# Altium PCB IHM.PcbDoc
Units mm, origin at the board's own origin, x right, y up, seen from the top; angles counter-clockwise.
Board outline 100 x 50 mm, 4 copper layers (Top Layer, Int1 (GND), Int2 (GND), Bottom Layer), stack 1.57 mm thick; 91 components, 84 nets, 309 pads, 71 vias.
Unrouted connection lines stored in the file: 16.
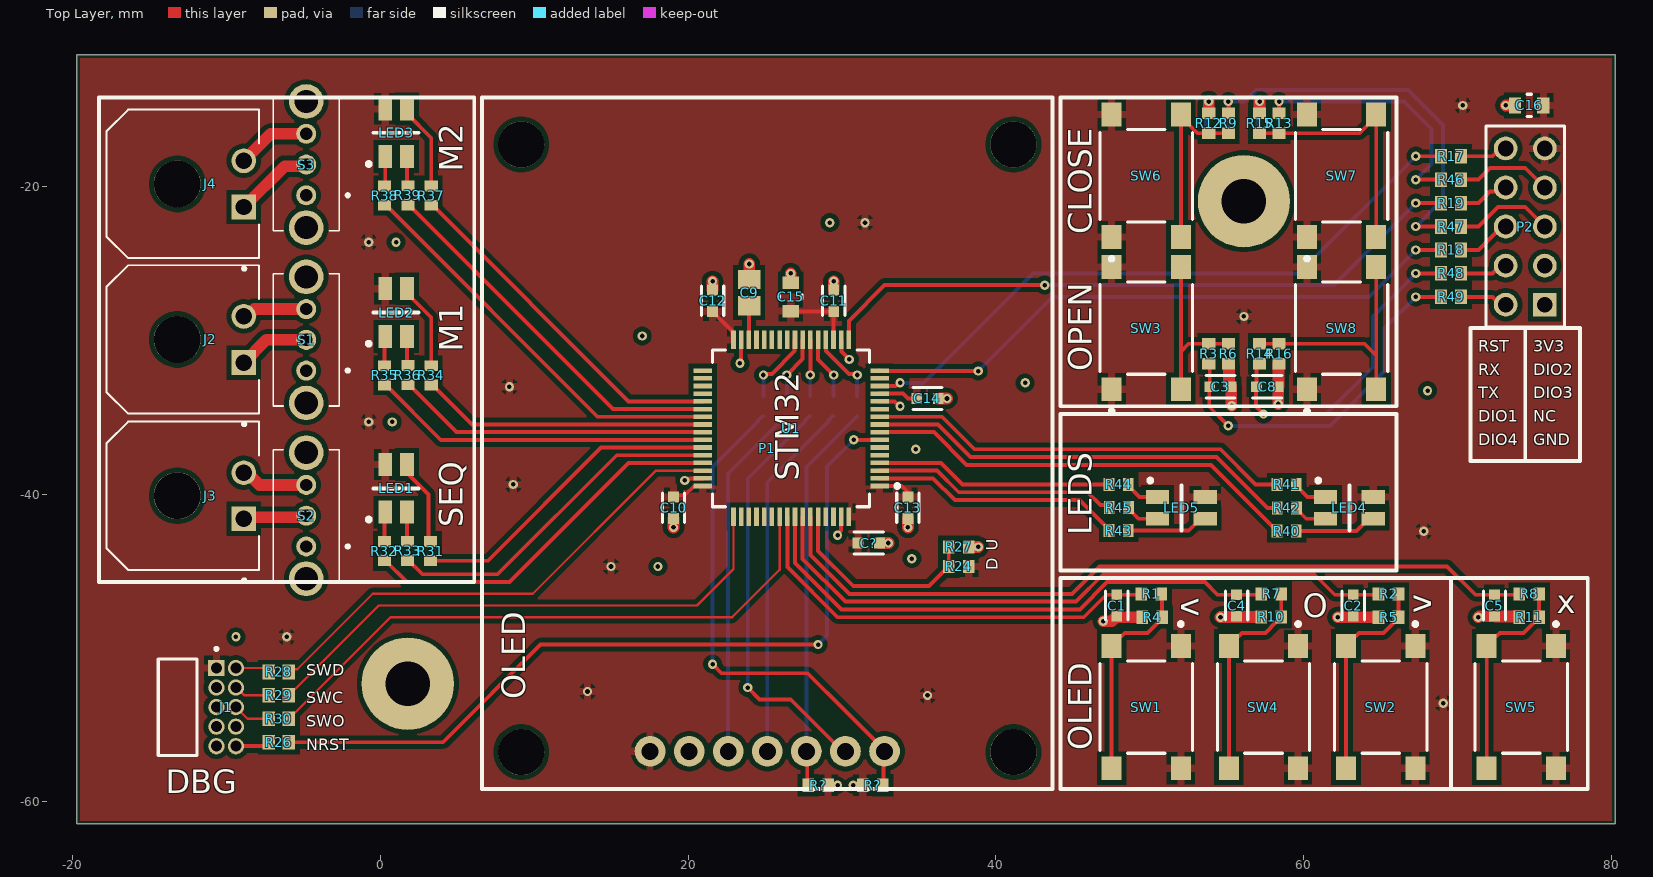
[diagram p0: Top Layer view]
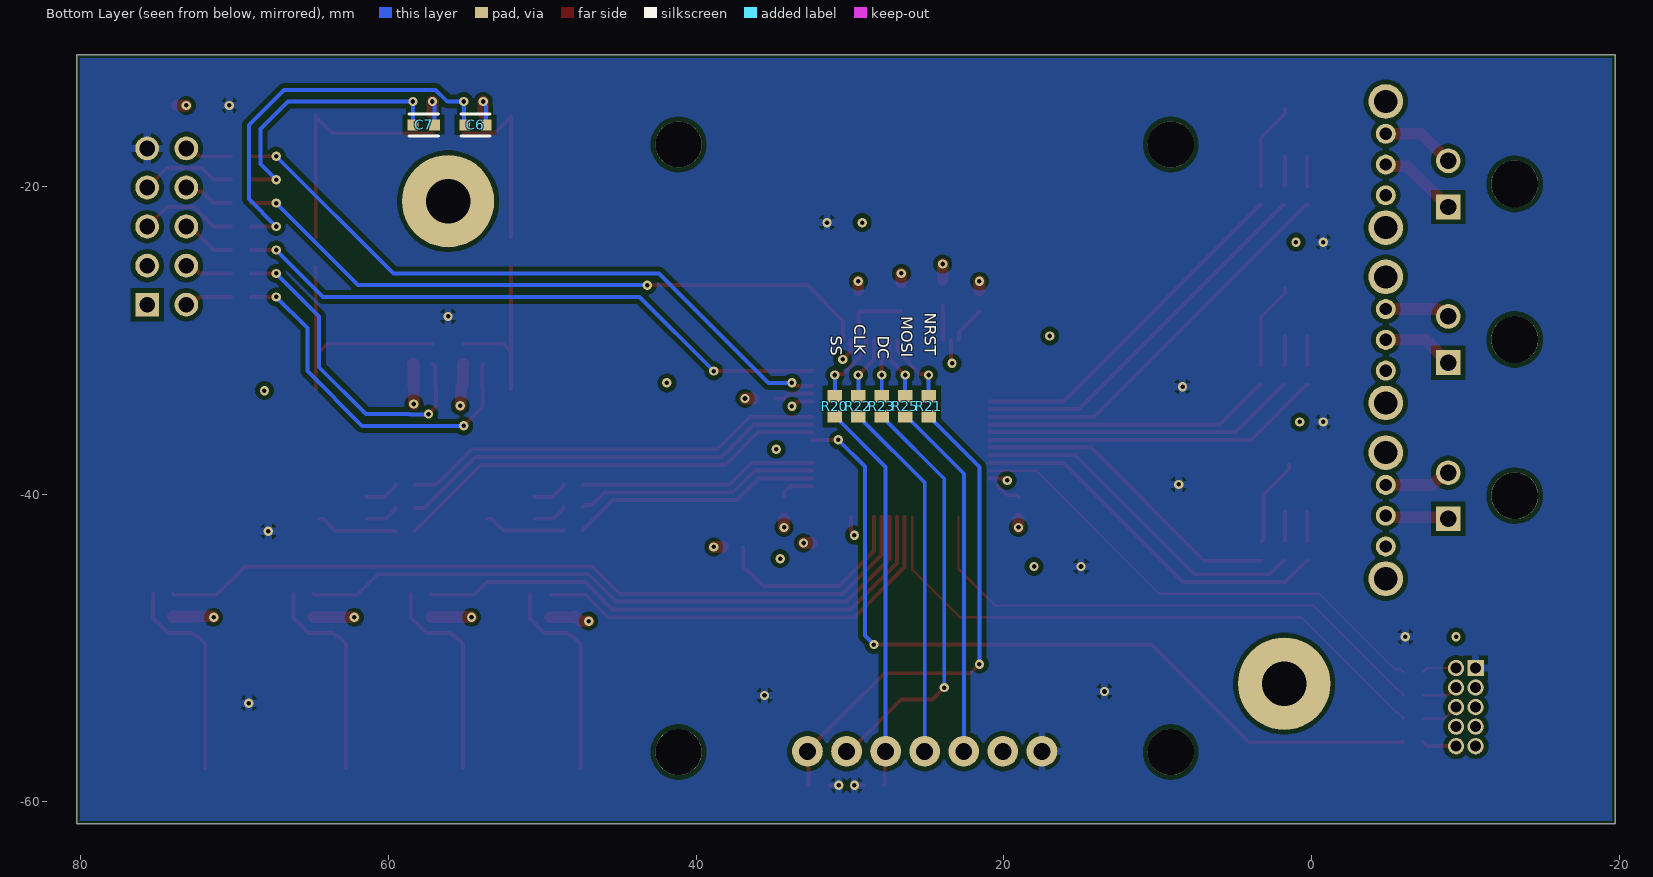
[diagram p1: Bottom Layer view, seen from below]
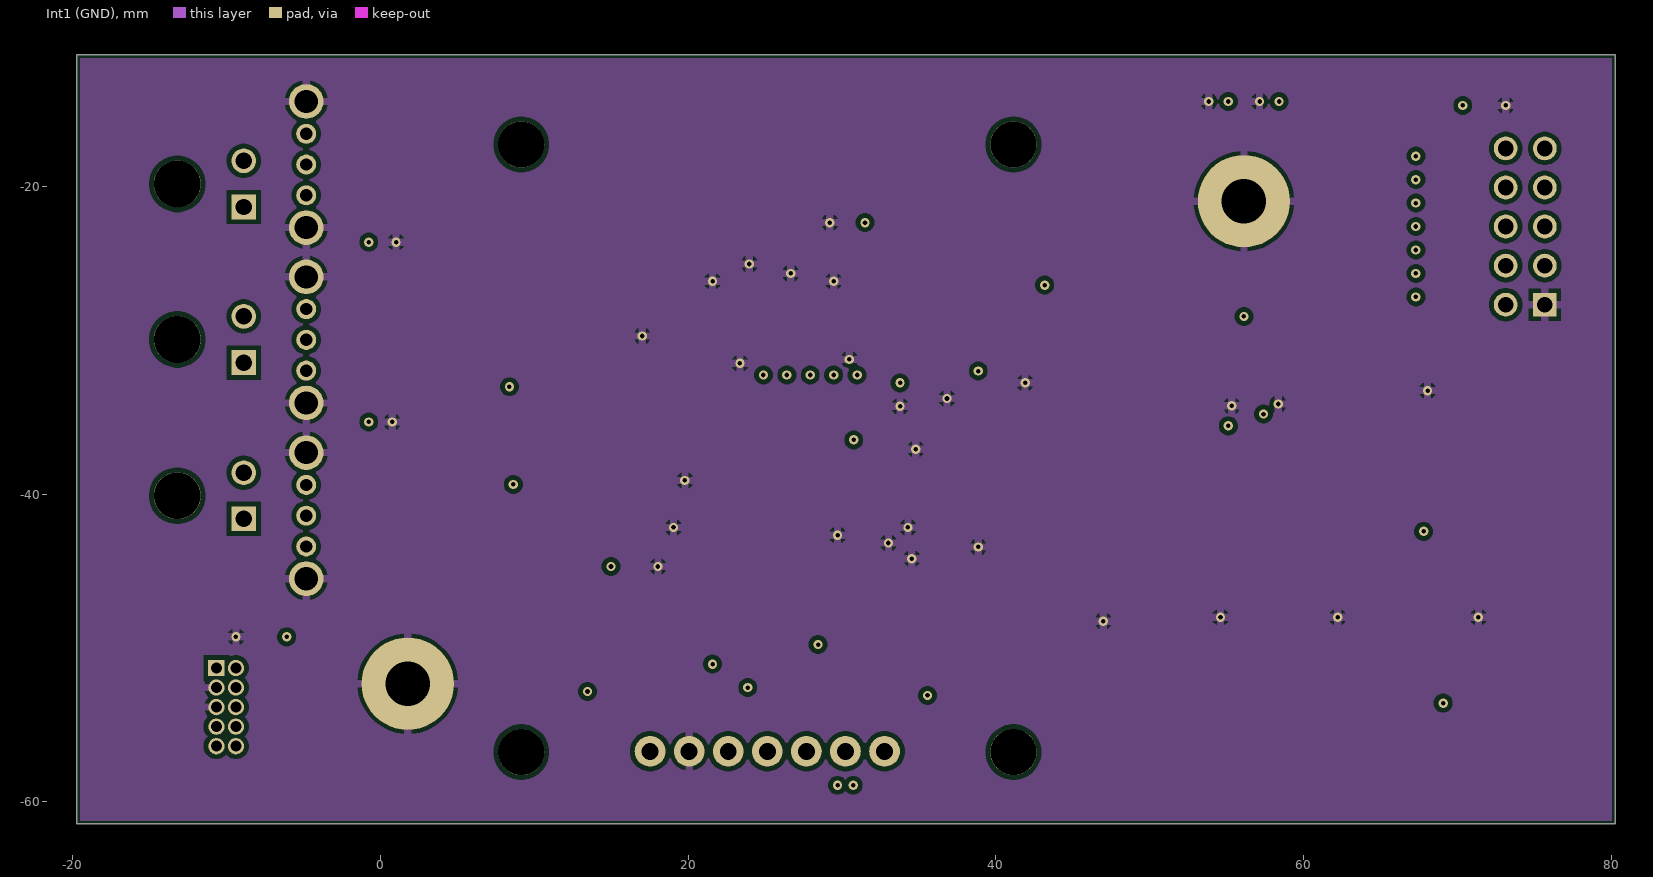
[diagram p2: Int1 (GND)]
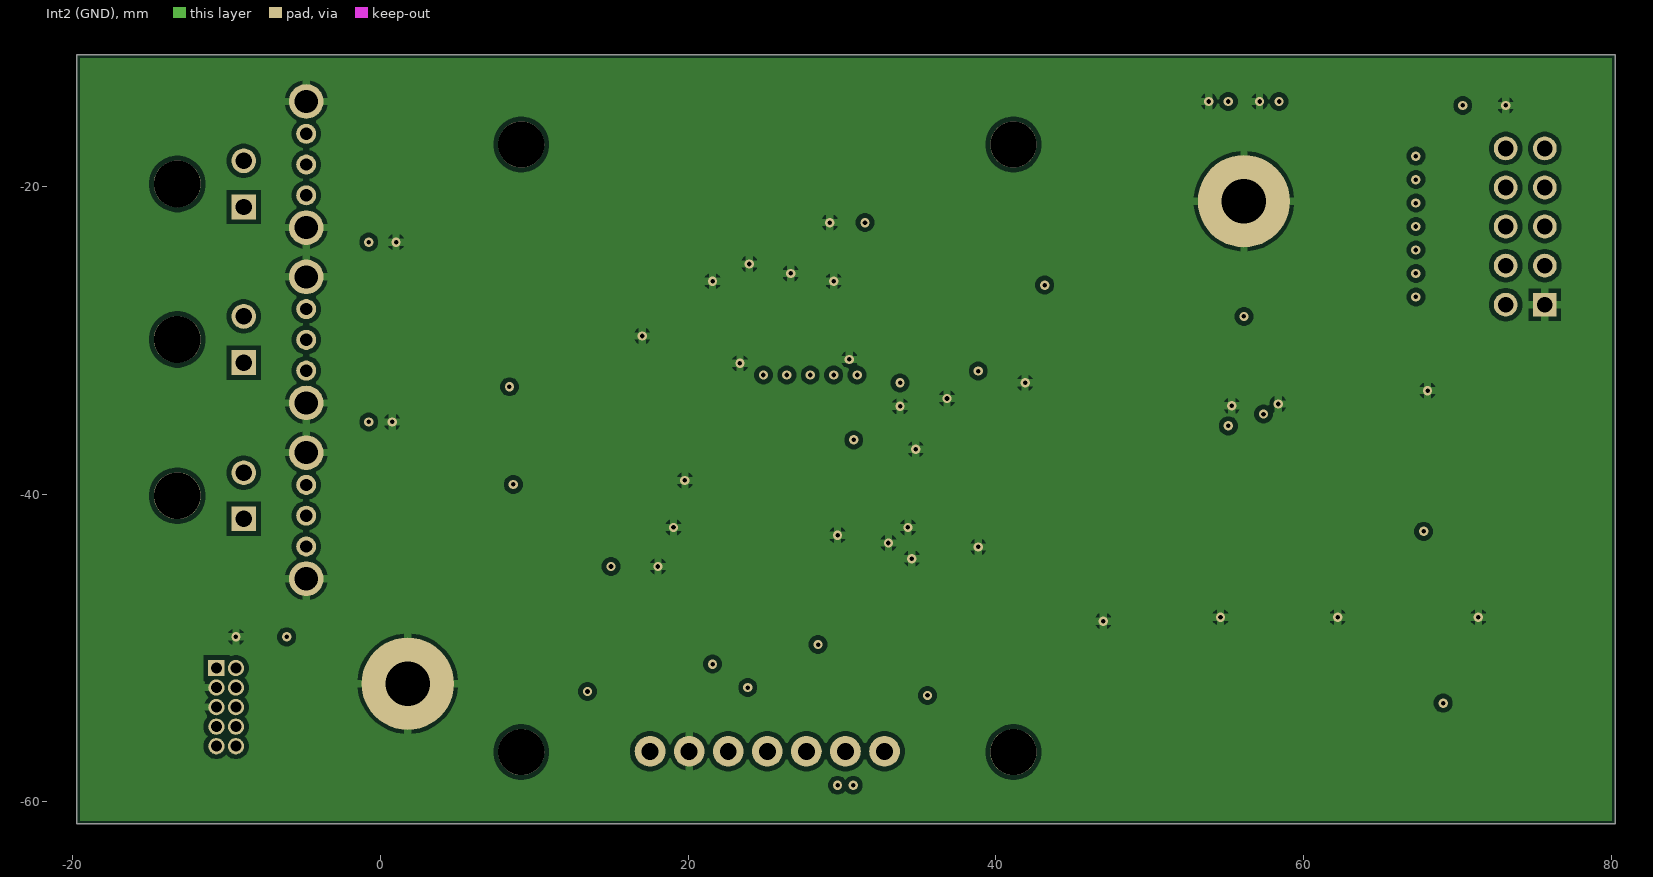
[diagram p3: Int2 (GND)]
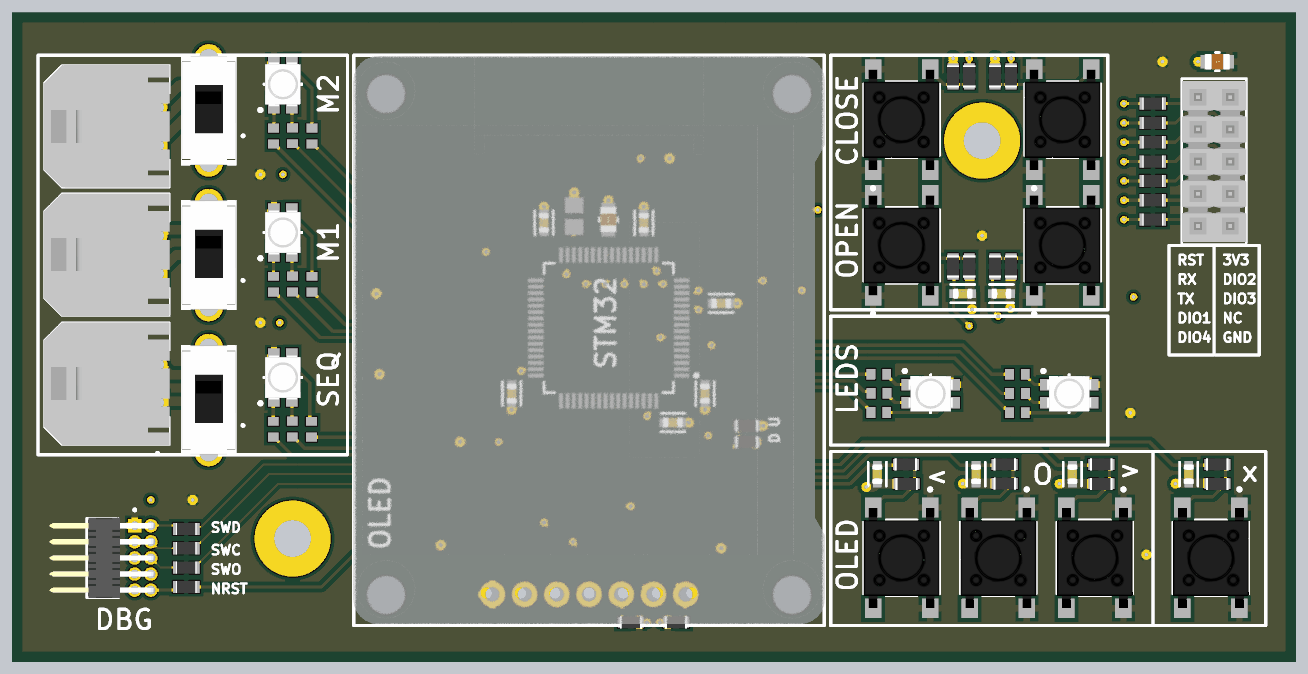
[diagram p4: 3D render of the assembled board from above, using the file's embedded part models]
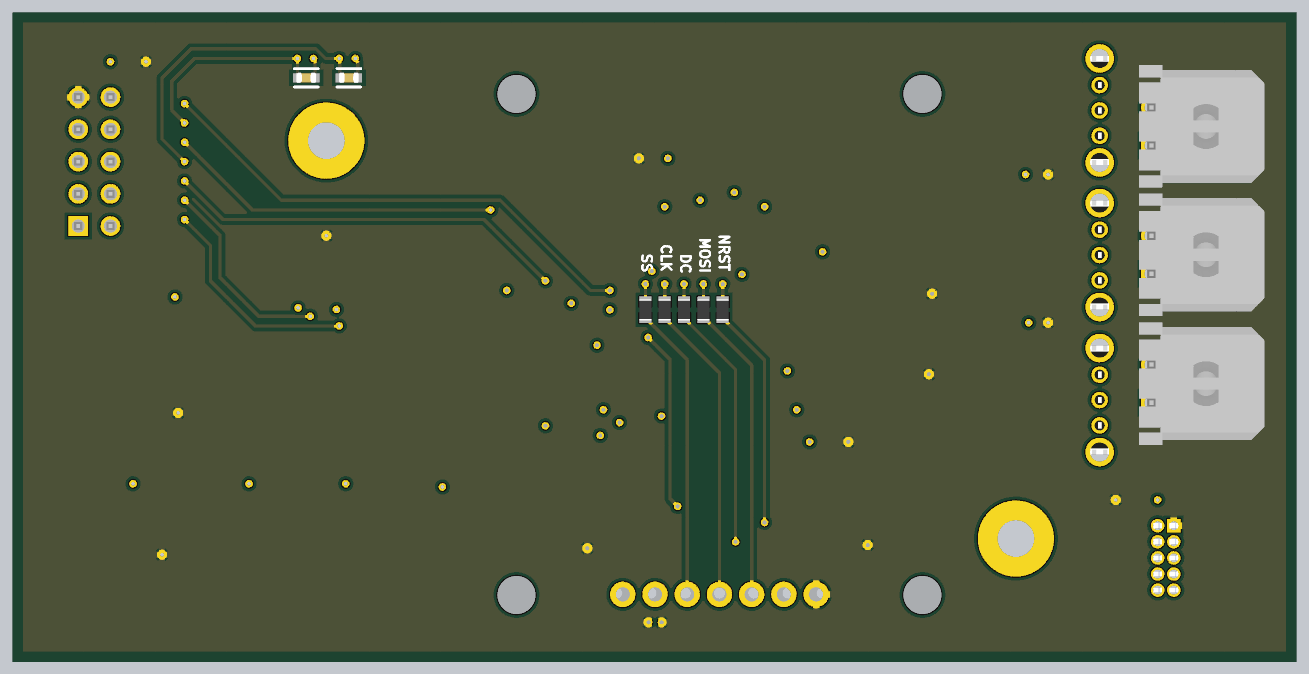
[diagram p5: 3D render of the assembled board from below, using the file's embedded part models]

## Layer stack, top to bottom
Top Solder: solder mask 0.0254, SM-001, Dk 4
Top Layer: signal copper 0.035
Dielectric 2: prepreg 0.1, PP-017, Dk 4.3
Int1 (GND): signal copper 0.0175
Dielectric 3: core 1.265, Core-039, Dk 4.8
Int2 (GND): signal copper 0.0175
Dielectric 4: prepreg 0.1, PP-017, Dk 4.3
Bottom Layer: signal copper 0.035
Bottom Solder: solder mask 0.0254, SM-001, Dk 4

## Board outline
-19.736,-61.446 -19.736,-11.446 80.264,-11.446 80.264,-61.446

## Design rules (kind name [scope] priority, off if disabled: settings)
BoardOutlineClearance [All] p1: gap=0.2 ignorepadtopadclearanceinfootprint=FALSE
Clearance HF_clearance [InNetClass('HF')] p1: gap=0.3 ignorepadtopadclearanceinfootprint=TRUE except(0.127: SMDPad-SMDPad; 0.2: Arc-SMDPad Arc-THPad Track-SMDPad Track-THPad; 0.254: Arc-Via Track-Via; 0.33: Arc-Hole Track-Hole; 0.5: THPad-THPad)
Clearance [All] p2: gap=0.3 ignorepadtopadclearanceinfootprint=TRUE except(0.127: Arc-Arc Arc-Track Track-Track SMDPad-SMDPad; 0.2: Arc-SMDPad Arc-THPad Track-SMDPad Track-THPad; 0.254: Arc-Via Track-Via; 0.33: Arc-Hole Track-Hole; 0.5: THPad-THPad)
DiffPairsRouting [InDifferentialPairClass('All Differential Pairs')] p1: maxlimit=0.127 minlimit=0.127 mostfreqgap=0.127 toplayer_minwidth=0.093 toplayer_maxwidth=0.093 toplayer_prefwidth=0.093 midlayer1_minwidth=0.088 midlayer1_maxwidth=0.088 midlayer1_prefwidth=0.088 midlayer2_minwidth=0.088 midlayer2_maxwidth=0.088 midlayer2_prefwidth=0.088 bottomlayer_minwidth=0.093 bottomlayer_maxwidth=0.093 bottomlayer_prefwidth=0.093 impedanceprofiledriven=TRUE maxuncoupledlength=12.7
HoleSize [All] p1: absolutevalues=TRUE maxlimit=6.3 minlimit=0.2 maxpercent=80.000 minpercent=20.000
HoleToHoleClearance [All] p1: gap=0.5 allowstackedmicrovias=TRUE
MatchedLengths MatchLengths_xSignals_U4_U5 [InxSignalClass('xSignals_U4_U5_MatchLengthsClass')] p1: tolerance=2.54 checknetsindiffpair=FALSE checkdiffpairvsdiffpair=TRUE checkxsignals=TRUE checkothers=TRUE
MatchedLengths MatchLengths_xSignals_U11_U4_2 [InxSignalClass('xSignals_U11_U4_MatchLengthsClass_2')] p2: tolerance=2.54 checknetsindiffpair=FALSE checkdiffpairvsdiffpair=TRUE checkxsignals=TRUE checkothers=TRUE
MatchedLengths MatchLengths_xSignals_U11_U4_1 [InxSignalClass('xSignals_U11_U4_MatchLengthsClass_1')] p3: tolerance=2.54 checknetsindiffpair=FALSE checkdiffpairvsdiffpair=TRUE checkxsignals=TRUE checkothers=TRUE
MatchedLengths MatchLengths_xSignals_U11_U4 [InxSignalClass('xSignals_U11_U4_MatchLengthsClass')] p4: tolerance=2 checknetsindiffpair=FALSE checkdiffpairvsdiffpair=TRUE checkxsignals=TRUE checkothers=TRUE
MatchedLengths MatchLengths_xSignals_J79_U4 [InxSignalClass('xSignals_J79_U4_MatchLengthsClass')] p5: tolerance=2 checknetsindiffpair=FALSE checkdiffpairvsdiffpair=TRUE checkxsignals=TRUE checkothers=TRUE
MatchedLengths MatchLengths_xSignals_U2_U4 [InxSignalClass('xSignals_U2_U4_MatchLengthsClass')] p6: tolerance=2 checknetsindiffpair=FALSE checkdiffpairvsdiffpair=TRUE checkxsignals=TRUE checkothers=TRUE
MatchedLengths MatchLengths_xSignals_SD1_U4 [InxSignalClass('xSignals_SD1_U4_MatchLengthsClass')] p7: tolerance=2 checknetsindiffpair=FALSE checkdiffpairvsdiffpair=TRUE checkxsignals=TRUE checkothers=TRUE
MatchedLengths MatchLengths_xSignals_SD_1 [InxSignalClass('xSignals_U3_U4_MatchLengthsClass')] p8: tolerance=2.54 checknetsindiffpair=FALSE checkdiffpairvsdiffpair=TRUE checkxsignals=TRUE checkothers=TRUE usedelayunits=TRUE delaytolerance=50.000000
MatchedLengths MatchLengths_U3_Passives_U4 [InxSignalClass('xSignals_U3_Passives_U4_MatchLengthsClass')] p9: tolerance=1.27 checknetsindiffpair=FALSE checkdiffpairvsdiffpair=TRUE checkxsignals=TRUE checkothers=TRUE
MatchedLengths MatchLengths_xSignals_U3_Passives [InxSignalClass('xSignals_U3_Passives_MatchLengthsClass')] p10: tolerance=1.27 checknetsindiffpair=FALSE checkdiffpairvsdiffpair=TRUE checkxsignals=TRUE checkothers=TRUE
MatchedLengths MatchLengths_xSignals_SD [InxSignalClass('xSignals_SD_MatchLengthsClass')] p11: tolerance=2.54 checknetsindiffpair=FALSE checkdiffpairvsdiffpair=TRUE checkxsignals=TRUE checkothers=TRUE
PolygonConnect [All] p1: connectstyle=Relief reliefconductorwidth=0.5 reliefentries=4 polygonreliefangle="90 Angle" airgapwidth=0.254
RoutingVias [All] p1: holewidth=0.3 width=0.6 viastyle="Through Hole" minholewidth=0.2 minwidth=0.4 maxholewidth=0.3 maxwidth=0.6
SolderMaskExpansion [All] p1: expansion=0.102 istentingtop=FALSE
UnRoutedNet [All] p1: checkbadconnections=TRUE
Width HF [InNetClass('HF')] p1: maxlimit=0.151 minlimit=0.151 preferedwidth=0.151 impedanceprofiledriven=TRUE impedanceprofileid={9BCC8DCB-DF7F-471B-8D5B-F17CECE35E11} impedanceprofilevalue=50.000000 minimp=50.000000 maximp=50.000000 favimp=50.000000
Width PWR [InNetClass('PWR')] p2: maxlimit=0.762 minlimit=0.254 preferedwidth=0.762 minimp=50.000000 maximp=50.000000 favimp=50.000000
Width [All] p3: maxlimit=0.254 minlimit=0.254 preferedwidth=0.254
26 further rules are at their usual default settings.

## Classes and differential pairs
net class PWR: GND NetJ2_1 NetJ2_2 NetJ3_1 NetJ3_2 NetJ4_1 NetJ4_2 VCC
net class HF: NetR28_2 NetR29_2 NetR30_2 SWCLK SWDIO SWO
component class SUPPLY: J2 J3 J4 S1 S2 S3
component class STM32: C9 C10 C11 C12 C13 C14 C15 C? J1 R17 R18 R19 R20 R21 R22 R23 R24 R25 R26 R27 R28 R29 R30 R? U1
component class OLED: P1
component class LED: LED1 LED2 LED3 LED4 LED5 R31 R32 R33 R34 R35 R36 R37 R38 R39 R40 R41 R42 R43 R44 R45
component class "CONN SEQ": C16 P2 R46 R47 R48 R49
component class BTN: C1 C2 C3 C4 C5 C6 C7 C8 O R1 R2 R3 R4 R5 R6 R7 R8 R9 R10 R11 R12 R13 R14 R15 R16 SW1 SW2 SW3 SW4 SW5 SW6 SW7 SW8 V

## Components (designator, comment, footprint, x,y, rotation, side; value= is the part's Value field where it differs from the comment)
C1 "CGA3E2X7R1E104K080AA" FP-CGA3E-0_3-0_1-MFG 47.864,-47.244 r270 top
C2 "CGA3E2X7R1E104K080AA" FP-CGA3E-0_3-0_1-MFG 63.246,-47.244 r270 top
C3 "CGA3E2X7R1E104K080AA" FP-CGA3E-0_3-0_1-MFG 54.61,-33.02 r0 top
C4 "CGA3E2X7R1E104K080AA" FP-CGA3E-0_3-0_1-MFG 55.658,-47.244 r270 top
C5 "CGA3E2X7R1E104K080AA" FP-CGA3E-0_3-0_1-MFG 72.422,-47.244 r270 top
C6 "CGA3E2X7R1E104K080AA" FP-CGA3E-0_3-0_1-MFG 54.356,-16.002 r180 bottom
C7 "CGA3E2X7R1E104K080AA" FP-CGA3E-0_3-0_1-MFG 57.72,-16.002 r180 bottom
C8 "CGA3E2X7R1E104K080AA" FP-CGA3E-0_3-0_1-MFG 57.658,-33.02 r0 top
C9 "GRM21BR71E225KA73L" CAPC2013X140X45NL15T25 23.972,-26.902 r270 top
C10 "CGA3E2X7R1E104K080AA" FP-CGA3E-0_3-0_1-MFG 19.05,-40.894 r270 top
C11 "CGA3E2X7R1E104K080AA" FP-CGA3E-0_3-0_1-MFG 29.464,-27.432 r90 top
C12 "CGA3E2X7R1E104K080AA" FP-CGA3E-0_3-0_1-MFG 21.59,-27.432 r90 top
C13 "CGA3E2X7R1E104K080AA" FP-CGA3E-0_3-0_1-MFG 34.29,-40.894 r270 top
C14 "CGA3E2X7R1E104K080AA" FP-CGA3E-0_3-0_1-MFG 35.56,-33.782 r0 top
C15 "C2012X6S1C106K125AC" FP-C2012-125-0_2-MFG 26.67,-27.178 r90 top
C16 "C2012X6S1C106K125AC" FP-C2012-125-0_2-MFG 74.676,-14.732 r180 top
C? "CGA3E2X7R1E104K080AA" FP-CGA3E-0_3-0_1-MFG 31.75,-43.18 r0 top
J1 "FTSH-105-01-F-D-RA" SAMTEC_FTSH-105-01-F-D-RA -10.668,-51.308 r90 top
J2 "436500200" MOLEX_436500200 -12.86,-29.948 r270 top
J3 "436500200" MOLEX_436500200 -12.86,-40.108 r270 top
J4 "436500200" MOLEX_436500200 -12.86,-19.836 r270 top
LED1 "150141M173100" 3528_A 1.016,-39.624 r90 top
LED2 "150141M173100" 3528_A 1.016,-28.194 r90 top
LED3 "150141M173100" 3528_A 1.016,-16.51 r90 top
LED4 "150141M173100" 3528_A 62.992,-40.894 r0 top
LED5 "150141M173100" 3528_A 52.07,-40.894 r0 top
P1 "Component_1" ? 9.148,-17.272 r90 top
P2 "TSW-105-15-G-D" SMTC-TSW-105-15-X-D 75.692,-27.686 r90 top
R1 "ERJ3EKF1002V" RESC1609X55X30LL15T15 50.118,-46.482 r180 top
R2 "ERJ3EKF1002V" RESC1609X55X30LL15T15 65.532,-46.482 r180 top
R3 "ERJ3EKF1002V" RESC1609X55X30LL15T15 53.848,-30.876 r270 top
R4 "ERJ3EKF1002V" RESC1609X55X30LL15T15 50.18,-48.006 r0 top
R5 "ERJ3EKF1002V" RESC1609X55X30LL15T15 65.532,-48.006 r0 top
R6 "ERJ3EKF1002V" RESC1609X55X30LL15T15 55.118,-30.876 r90 top
R7 "ERJ3EKF1002V" RESC1609X55X30LL15T15 57.912,-46.482 r180 top
R8 "ERJ3EKF1002V" RESC1609X55X30LL15T15 74.676,-46.482 r180 top
R9 "ERJ3EKF1002V" RESC1609X55X30LL15T15 55.118,-15.89 r90 top
R10 "ERJ3EKF1002V" RESC1609X55X30LL15T15 57.912,-47.986 r0 top
R11 "ERJ3EKF1002V" RESC1609X55X30LL15T15 74.676,-48.006 r0 top
R12 "ERJ3EKF1002V" RESC1609X55X30LL15T15 53.848,-15.89 r270 top
R13 "ERJ3EKF1002V" RESC1609X55X30LL15T15 58.42,-15.89 r90 top
R14 "ERJ3EKF1002V" RESC1609X55X30LL15T15 57.15,-30.876 r270 top
R15 "ERJ3EKF1002V" RESC1609X55X30LL15T15 57.15,-15.89 r270 top
R16 "ERJ3EKF1002V" RESC1609X55X30LL15T15 58.42,-30.876 r90 top
R17 "CRCW06030000Z0EA" RESC1609X50X30NL8T20 69.596,-18.034 r180 top
R18 "CRCW06030000Z0EA" RESC1609X50X30NL8T20 69.596,-24.13 r180 top
R19 "CRCW06030000Z0EA" RESC1609X50X30NL8T20 69.596,-21.082 r180 top
R20 "CRCW06030000Z0EA" RESC1609X50X30NL8T20 30.988,-34.29 r90 bottom
R21 "CRCW06030000Z0EA" RESC1609X50X30NL8T20 24.892,-34.29 r270 bottom
R22 "CRCW06030000Z0EA" RESC1609X50X30NL8T20 29.464,-34.29 r90 bottom
R23 "CRCW06030000Z0EA" RESC1609X50X30NL8T20 27.94,-34.29 r90 bottom
R24 "ERJ3EKF1002V" RESC1609X55X30LL15T15 37.592,-44.704 r0 top
R25 "CRCW06030000Z0EA" RESC1609X50X30NL8T20 26.416,-34.29 r90 bottom
R26 "CRCW06030000Z0EA" RESC1609X50X30NL8T20 -6.604,-56.134 r180 top
R27 "ERJ3EKF1002V" RESC1609X55X30LL15T15 37.592,-43.434 r180 top
R28 "CRCW06030000Z0EA" RESC1609X50X30NL8T20 -6.604,-51.562 r0 top
R29 "CRCW06030000Z0EA" RESC1609X50X30NL8T20 -6.604,-53.086 r0 top
R30 "CRCW06030000Z0EA" RESC1609X50X30NL8T20 -6.604,-54.61 r0 top
R31 "ERJ-3EKF1000V" RESC1608X55X30LL15T15 3.263,-43.704 r90 top
R32 "ERJ-3EKF1000V" RESC1608X55X30LL15T15 0.254,-43.704 r90 top
R33 "ERJ-3EKF1000V" RESC1608X55X30LL15T15 1.758,-43.688 r90 top
R34 "ERJ-3EKF1000V" RESC1608X55X30LL15T15 3.302,-32.274 r90 top
R35 "ERJ-3EKF1000V" RESC1608X55X30LL15T15 0.274,-32.274 r90 top
R36 "ERJ-3EKF1000V" RESC1608X55X30LL15T15 1.778,-32.258 r90 top
R37 "ERJ-3EKF1000V" RESC1608X55X30LL15T15 3.302,-20.59 r90 top
R38 "ERJ-3EKF1000V" RESC1608X55X30LL15T15 0.274,-20.59 r90 top
R39 "ERJ-3EKF1000V" RESC1608X55X30LL15T15 1.778,-20.574 r90 top
R40 "ERJ-3EKF1000V" RESC1608X55X30LL15T15 58.912,-42.398 r0 top
R41 "ERJ-3EKF1000V" RESC1608X55X30LL15T15 58.912,-39.37 r0 top
R42 "ERJ-3EKF1000V" RESC1608X55X30LL15T15 58.928,-40.894 r0 top
R43 "ERJ-3EKF1000V" RESC1608X55X30LL15T15 47.99,-42.379 r0 top
R44 "ERJ-3EKF1000V" RESC1608X55X30LL15T15 47.99,-39.37 r0 top
R45 "ERJ-3EKF1000V" RESC1608X55X30LL15T15 48.006,-40.874 r0 top
R46 "CRCW06030000Z0EA" RESC1609X50X30NL8T20 69.596,-19.558 r180 top
R47 "CRCW06030000Z0EA" RESC1609X50X30NL8T20 69.596,-22.606 r180 top
R48 "CRCW06030000Z0EA" RESC1609X50X30NL8T20 69.596,-25.654 r0 top
R49 "CRCW06030000Z0EA" RESC1609X50X30NL8T20 69.596,-27.178 r0 top
R? "ERJ3EKF1002V" RESC1609X55X30LL15T15 32.004,-58.928 r180 top
R? "ERJ3EKF1002V" RESC1609X55X30LL15T15 28.448,-58.928 r0 top
S1 "OS102011MS2QN1C" OS102011MS2QN1C -4.826,-31.972 r90 top
S2 "OS102011MS2QN1C" OS102011MS2QN1C -4.826,-43.402 r90 top
S3 "OS102011MS2QN1C" OS102011MS2QN1C -4.826,-20.574 r90 top
SW1 "PTS645SM43SMTR92LFS" FP-PTS645SM43SMTR92LFS-MFG 49.784,-53.848 r270 top
SW2 "PTS645SM43SMTR92LFS" FP-PTS645SM43SMTR92LFS-MFG 65.024,-53.848 r270 top
SW3 "PTS645SM43SMTR92LFS" FP-PTS645SM43SMTR92LFS-MFG 49.784,-29.21 r90 top
SW4 "PTS645SM43SMTR92LFS" FP-PTS645SM43SMTR92LFS-MFG 57.404,-53.848 r270 top
SW5 "PTS645SM43SMTR92LFS" FP-PTS645SM43SMTR92LFS-MFG 74.168,-53.848 r270 top
SW6 "PTS645SM43SMTR92LFS" FP-PTS645SM43SMTR92LFS-MFG 49.784,-19.304 r90 top
SW7 "PTS645SM43SMTR92LFS" FP-PTS645SM43SMTR92LFS-MFG 62.484,-19.304 r90 top
SW8 "PTS645SM43SMTR92LFS" FP-PTS645SM43SMTR92LFS-MFG 62.484,-29.21 r90 top
U1 "STM32F446RET6" FP-LQFP64-5W-MFG 26.698,-35.722 r180 top

## Footprints (in the part's own frame and the unit in brackets; to place one, negate y for a bottom-side part, rotate by r counter-clockwise, add the part's x,y. Pads: shape width x height; smd on the part's side, far side on the other; paste and mask are expansions set on the pad)
3528_A [mm] "Chip LED, 4-Leads, Body 2.8x3.5mm (max), Pitch 1.42mm, IPC Medium Density"
  rect 1.5x0.9 smd: 1(1.55,0.707) 2(1.55,-0.71) 3(-1.55,0.707) 4(-1.55,-0.707)
  silkscreen extent -2.15,-1.5 0.03,1.9, body extent -1.75,-1.4 1.75,1.4, height 1.87
CAPC2013X140X45NL15T25 [mm] "Chip Capacitor, 2-Leads, Body 2.00x1.25mm, IPC Medium Density"
  rect 1.25x1.45 smd: 1(-0.85,0) 2(0.85,0)
  body extent -1.08,-0.7 1.07,0.7, height 1.4
FP-C2012-125-0_2-MFG [mm]
  rect 0.8x1.05 smd paste+0 mask+0: 1(-0.925,0) 2(0.925,0)
  silkscreen extent -0.15,-0.72 0.15,0.72, body extent -1.43,-0.82 1.43,0.82, height 0.25
FP-CGA3E-0_3-0_1-MFG [mm]
  rect 0.7x0.7 smd paste+0 mask+0: 1(-0.7,0) 2(0.7,0)
  silkscreen extent -0.95,-0.72 0.95,0.72, body extent -1.15,-0.65 1.15,0.65, height 0.25
FP-LQFP64-5W-MFG [mm]
  rect 1.2x0.3 smd paste+0 mask+0: 1(-5.75,3.75) 2(-5.75,3.25) 3(-5.75,2.75) 4(-5.75,2.25) 5(-5.75,1.75) 6(-5.75,1.25) 7(-5.75,0.75) 8(-5.75,0.25) 9(-5.75,-0.25) 10(-5.75,-0.75) 11(-5.75,-1.25) 12(-5.75,-1.75) 13(-5.75,-2.25) 14(-5.75,-2.75) 15(-5.75,-3.25) 16(-5.75,-3.75) 33(5.75,-3.75) 34(5.75,-3.25) 35(5.75,-2.75) 36(5.75,-2.25) 37(5.75,-1.75) 38(5.75,-1.25) 39(5.75,-0.75) 40(5.75,-0.25) 41(5.75,0.25) 42(5.75,0.75) 43(5.75,1.25) 44(5.75,1.75) 45(5.75,2.25) 46(5.75,2.75) 47(5.75,3.25) 48(5.75,3.75)
  rect 0.3x1.2 smd paste+0 mask+0: 17(-3.75,-5.75) 18(-3.25,-5.75) 19(-2.75,-5.75) 20(-2.25,-5.75) 21(-1.75,-5.75) 22(-1.25,-5.75) 23(-0.75,-5.75) 24(-0.25,-5.75) 25(0.25,-5.75) 26(0.75,-5.75) 27(1.25,-5.75) 28(1.75,-5.75) 29(2.25,-5.75) 30(2.75,-5.75) 31(3.25,-5.75) 32(3.75,-5.75) 49(3.75,5.75) 50(3.25,5.75) 51(2.75,5.75) 52(2.25,5.75) 53(1.75,5.75) 54(1.25,5.75) 55(0.75,5.75) 56(0.25,5.75) 57(-0.25,5.75) 58(-0.75,5.75) 59(-1.25,5.75) 60(-1.75,5.75) 61(-2.25,5.75) 62(-2.75,5.75) 63(-3.25,5.75) 64(-3.75,5.75)
  silkscreen extent -7.02,-5.1 5.1,5.1
FP-PTS645SM43SMTR92LFS-MFG [mm]
  rect 1.55x1.3 smd paste+0 mask+0: 1(-3.975,2.25) 2(3.975,2.25) 3(-3.975,-2.25) 4(3.975,-2.25)
  silkscreen extent -5.52,-3 3,3, body extent -4.85,-3.1 4.85,3.1, height 0.25
MOLEX_436500200 [mm]
  rect 1.605x1.605 hole 1.07: 1(1.5,3.97)
  round 1.605 hole 1.07: 2(-1.5,3.97)
  round 3.05 hole 3.05 unplated: ""(0,-0.35)
  silkscreen extent -4.82,-4.95 5.6,4.95, body extent -4.82,-4.95 4.82,4.95, height 3.14
OS102011MS2QN1C [mm]
  round 1.3 hole 0.8: 1(0,0) 2(2,0) 3(4,0)
  round 2.25 hole 1.5: MH1(-2.1,0) MH2(6.1,0)
  silkscreen extent -2.3,-2.8 6.3,2.15, body extent -2.3,-2.15 6.3,2.15, height 8.61
RESC1608X55X30LL15T15 [mm] "Chip Resistor, 2-Leads, Body 1.60x0.80mm, IPC High Density"
  rect 0.7x0.85 smd: 1(-0.625,0) 2(0.625,0)
  body extent -0.87,-0.48 0.87,0.48, height 0.55
RESC1609X50X30NL8T20 [mm] "Chip Resistor, 2-Leads, Body 1.65x0.95mm, IPC Medium Density"
  rect 0.8x0.95 smd: 1(-0.65,0) 2(0.65,0)
  body extent -0.82,-0.48 0.82,0.48, height 0.5
RESC1609X55X30LL15T15 [mm] "Chip Resistor, 2-Leads, Body 1.75x0.95mm, IPC High Density"
  rect 0.75x0.85 smd: 1(-0.65,0) 2(0.65,0)
  body extent -0.87,-0.48 0.87,0.48, height 0.55
SAMTEC_FTSH-105-01-F-D-RA [mm]
  rect 1.06x1.06 hole 0.71: 01(0,0)
  round 1.06 hole 0.71: 02(0,-1.27) 03(-1.27,0) 04(-1.27,-1.27) 05(-2.54,0) 06(-2.54,-1.27) 07(-3.81,0) 08(-3.81,-1.27) 09(-5.08,0) 10(-5.08,-1.27)
  silkscreen extent -5.68,-0.1 1.34,3.78, body extent -5.72,-1.6 0.64,6.71, height 3.44
SMTC-TSW-105-15-X-D [mm] ".025 SQ Post Terminal Strip Assembly, 2x5 Pins, Vertical, 2.54mm Pitch, Male"
  rect 1.55x1.55 hole 1.02: 1(0,0)
  round 1.55 hole 1.02: 2(0,2.54) 3(2.54,0) 4(2.54,2.54) 5(5.08,0) 6(5.08,2.54) 7(7.62,0) 8(7.62,2.54) 9(10.16,0) 10(10.16,2.54)
  silkscreen extent -1.46,-1.27 11.62,3.81, body extent -1.27,-1.27 11.43,3.81, height 15.75
? [mm]
  round 2 hole 1.1: 1(-39.45,-8.38) 2(-39.45,-10.92) 3(-39.45,-13.46) 4(-39.45,-16) 5(-39.45,-18.54) 6(-39.45,-21.08) 7(-39.45,-23.62)
  round 3 hole 3 unplated: 8(-39.5,-32) 8(-39.5,0) 8(0,0) 8(0,-32)
  body extent -41.8,-34.6 3,2.6, height 8.89

## Part data
C1 C2 C3 C4 C5 C6 C7 C8 C10 C11 C12 C13 C14 C?: library part CMP-08246-002186-1, "Cap Ceramic 100nF 25V X7R 10% Pad SMD 0603 +125°C Automotive T/R", Capacitance=100nF, Case Code (Imperial)=0603, Case Code (Metric)=1608, Dielectric=X7R, Manufacturer=TDK, Max Operating Temperature=125°C, Min Operating Temperature=-55°C, Package Quantity=1, Ratings=AEC-Q200, Resistor Type=Ceramic, Supplier Part Number 1=445-5667-1-ND, Tolerance=10%, Voltage Rating=25V, Case/Package=0603, Category="Ceramic Capacitors", ComponentLink1Description=https://datasheet.ciiva.com/24220/cga3e2x7r1e104k080aa-265934-24220022.pdf?src-supplier=Mouser, ComponentLink1URL=https://datasheet.ciiva.com/24220/cga3e2x7r1e104k080aa-265934-24220022.pdf?src-supplier=Mouser, ComponentLink2Description=https://datasheet.ciiva.com/22725/1735392-22725638.pdf?src-supplier=Element14, ComponentLink2URL=https://datasheet.ciiva.com/22725/1735392-22725638.pdf?src-supplier=Element14, ComponentLink3Description=https://datasheet.ciiva.com/22725/1735392-22725639.pdf?src-supplier=Element14, ComponentLink3URL=https://datasheet.ciiva.com/22725/1735392-22725639.pdf?src-supplier=Element14, ComponentLink4Description=https://datasheet.ciiva.com/16427/mlccspec-automotive-general-midvoltage-en-16427320.pdf?src-supplier=Future+Electronics, ComponentLink4URL=https://datasheet.ciiva.com/16427/mlccspec-automotive-general-midvoltage-en-16427320.pdf?src-supplier=Future+Electronics, ComponentLink5Description=https://datasheet.ciiva.com/23803/1735392-23803082.pdf?src-supplier=Newark, ComponentLink5URL=https://datasheet.ciiva.com/23803/1735392-23803082.pdf?src-supplier=Newark, Composition=Ceramic, Depth=0.8mm, Height=0.8mm, Lead Free="Lead Free", Length=1.6mm, Manufacturer Part Number=CGA3E2X7R1E104K080AA, Mount="Surface Mount", Packaging="Tape and Reel", Pricing 1="1=0,10000, 10=0,05400, 50=0,02960, 100=0,02430, 500=0,01732, 1000=0,01361 (USD)", REACH SVHC="No SVHC", RoHS=Yes, RoHS Compliant=Yes, Series=CGA, Stock 1=436091, Supplier 1=Digi-Key, Termination=SMD/SMT, Thickness=0.035inch, Voltage Rating (DC)=25V, Weight=7.1E-05oz, Width=0.031inch
C9: library part CMP-2007-03405-1, Capacitance=2.2uF, Case Code (Imperial)=0805, Case Code (Metric)=2012, Dielectric=X7R, Manufacturer=Murata, Max Operating Temperature=125°C, Min Operating Temperature=-55°C, Package Quantity=1, Tolerance=10%, Voltage=25V, Case/Package=0805, Category="Ceramic Capacitors", ComponentLink1Description=https://datasheet.ciiva.com/34302/1858990-34302875.pdf?src-supplier=Jameco, ComponentLink1URL=https://datasheet.ciiva.com/34302/1858990-34302875.pdf?src-supplier=Jameco, ComponentLink2Description=https://datasheet.ciiva.com/140/product-140527.pdf?src-supplier=Digi-Key, ComponentLink2URL=https://datasheet.ciiva.com/140/product-140527.pdf?src-supplier=Digi-Key, ComponentLink3Description=https://datasheet.ciiva.com/2989/product-2989728.pdf?src-supplier=Avnet, ComponentLink3URL=https://datasheet.ciiva.com/2989/product-2989728.pdf?src-supplier=Avnet, ComponentLink4Description=https://datasheet.ciiva.com/3776/1141grm21br71e225ka7323-3776998.pdf?src-supplier=Arrow+Electronics, ComponentLink4URL=https://datasheet.ciiva.com/3776/1141grm21br71e225ka7323-3776998.pdf?src-supplier=Arrow+Electronics, ComponentLink5Description=https://datasheet.ciiva.com/29202/450858-da-01-de-vs-chip-kond-0805-2-2-uf-10pr-25-0v-x7r-29202678.pdf?src-supplier=Conrad, ComponentLink5URL=https://datasheet.ciiva.com/29202/450858-da-01-de-vs-chip-kond-0805-2-2-uf-10pr-25-0v-x7r-29202678.pdf?src-supplier=Conrad, ComponentLink6Description=https://datasheet.ciiva.com/29199/454778-da-01-en-vs-kondensator-0805-29199535.pdf?src-supplier=Conrad, ComponentLink6URL=https://datasheet.ciiva.com/29199/454778-da-01-en-vs-kondensator-0805-29199535.pdf?src-supplier=Conrad, ComponentLink7Description=https://datasheet.ciiva.com/14116/grmseries-highdielectrictype-eng-14116411.pdf?src-supplier=Distrelec, ComponentLink7URL=https://datasheet.ciiva.com/14116/grmseries-highdielectrictype-eng-14116411.pdf?src-supplier=Distrelec, ComponentLink8Description=https://datasheet.ciiva.com/7937/415307-7937706.pdf?src-supplier=Element14, ComponentLink8URL=https://datasheet.ciiva.com/7937/415307-7937706.pdf?src-supplier=Element14, ComponentLink9Description=https://datasheet.ciiva.com/140/product-140528.pdf?src-supplier=Digi-Key, ComponentLink9URL=https://datasheet.ciiva.com/140/product-140528.pdf?src-supplier=Digi-Key, ComponentLink10Description=https://datasheet.ciiva.com/140/product-140529.pdf?src-supplier=Digi-Key, ComponentLink10URL=https://datasheet.ciiva.com/140/product-140529.pdf?src-supplier=Digi-Key, ComponentLink11Description=https://datasheet.ciiva.com/16625/product-16625259.pdf?src-supplier=Avnet+Europe, ComponentLink11URL=https://datasheet.ciiva.com/16625/product-16625259.pdf?src-supplier=Avnet+Europe, ComponentLink12Description=https://datasheet.ciiva.com/2989/product-2989727.pdf?src-supplier=Avnet, ComponentLink12URL=https://datasheet.ciiva.com/2989/product-2989727.pdf?src-supplier=Avnet, Depth=1.25mm, Height=1.25mm, Lead Free="Lead Free", Length=2mm, Manufacturer Part Number=GRM21BR71E225KA73L, Material=Ceramic, Mount="Surface Mount", Packaging="Tape and Reel", Part Number=GRM21BR71E225KA73L, Pricing 1="3000=0,15000, 6000=0,14850, 9000=0,14700, 12000=0,14550, 15000=0,14400, 24000=0,14250 (USD)", Radiation Hardening=No, REACH SVHC="No SVHC", RoHS=Yes, RoHS Compliant=Yes, Stock 1=12000, Supplier 1="Arrow Electronics", Supplier Part Number 1=GRM21BR71E225KA73L, Termination=SMD/SMT, Thickness=0.053inch, Voltage Rating=25V, Voltage Rating (DC)=25V, Width=0.049inch
C15 C16: library part CMP-08246-003655-1, "Multilayer Ceramic Capacitors 10μF ±10% 16V X6S SMD 0805", Capacitance=10uF, Case Code (Imperial)=0805, Case Code (Metric)=2012, Dielectric=X6S, Dielectric Material=Ceramic, Max Operating Temperature=105°C, Min Operating Temperature=-55°C, Package Quantity=1, Tolerance=10%, Voltage Rating=16V, Case/Package=0805, Construction=Flat, Contact Plating=Tin, Depth=1.25mm, Height=1.25mm, Lead Free="Lead Free", Length=2mm, Mount="Surface Mount", Packaging="Tape and Reel", REACH SVHC="No SVHC", RoHS Compliant=Yes, Series=C, Thickness=0.057inch, Voltage Rating (DC)=16V, Width=0.049inch
J1 J2 J3 J4: Package=None, Availability=Unavailable, Price=None
  J1: MF="{'manufacturer': u'Samtec'}", MP=FTSH-105-01-F-D-RA
  J2 J3 J4: MF="{'manufacturer': u'Molex'}", MP=436500200
LED1 LED2 LED3 LED4 LED5: library part CMP-1431-00001-1, "SMD Full-Color Top LED, WL-SFTW, Red & Green & Blue", Color="Red & Green & Blue", Manufacturer="Wuerth Elektronik", ComponentLink1Description="Manufacturer URL", ComponentLink1URL=http://www.we-online.com, ComponentLink2Description=Datasheet, ComponentLink2URL=http://katalog.we-online.com/led/datasheet/150141M173100.pdf, PackageReference=3528_A, PartNumber=150141M173100
P2: library part CMP-1024-00369-1, "0.025\" SQ Post Header, Through-hole, Vertical, -55 to 125 degC, 2.54 mm Pitch, 10-Pin, Male, RoHS", Manufacturer=Samtec, Temperature Range="-55 to 125 degC", ComponentLink1Description="Manufacturer URL", ComponentLink1URL=http://www.samtec.com, ComponentLink2Description=Datasheet, ComponentLink2URL=http://www.samtec.com/documents/webfiles/pdf/TSW_TH.PDF, ComponentLink3Description="Package Specification", ComponentLink3URL=http://www.samtec.com/documents/webfiles/cpdf/TSW-XXX-XX-XXX-X-XX-XXX-MKT.pdf, DatasheetVersion=F-214, Mounting Technology=Through-hole, Orientation=Vertical, PackageDescription=".025[0.64] SQ. Post Terminal Strip Assembly", PackageReference=TSW-105-15-X-D, PackageVersion="DM, 8/1988", PartNumber=TSW-105-15-G-D, Pitch="2.54 mm", RoHS=True
R1 R2 R3 R4 R5 R6 R7 R8 R9 R10 R11 R12 R13 R14 R15 R16 R24 R27 R? R?: library part CMP-1012-00623-3, "Chip Resistor, 10 KOhm, +/- 1%, 0.1 W, -55 to 155 degC, 0603 (1608 Metric), RoHS, Tape and Reel", Case Code (Imperial)=0603, Case Code (Metric)=1608, Manufacturer=Panasonic, Max Operating Temperature=155degC, Max Power Dissipation=100mW, Min Operating Temperature=-55degC, Package Description="2-Pin Surface Mount Device, Body 1.6 x 0.85 mm", Package Quantity=1, Package Reference=603, Resistance=10kR, Temperature Coefficient=100ppm\/degreesC, Tolerance=1%, Voltage Rating=75V, Case\/Package=0603, Composition=ThickFilm, Contact Plating=Tin, Datasheet URL=https://industrial.panasonic.com/cdbs/www-data/pdf/RDA0000/AOA0000C304.pdf, Datasheet Version=02/2017, Depth=0.8mm, Height=0.45mm, Lead Free=LeadFree, Length=1.6mm, Manufacturer URL=http://www.panasonic.com/, Military Standard=Not, Mount=SurfaceMount, Mounting Technology=SurfaceMount, Number of Pins=2, Number of Terminations=2, Packaging=TapeandReel, Power Rating=100mW, Radiation Hardening=No, REACH SVHC=NoSVHC, RoHSCompliant=true, Termination=SMD/SMT, Voltage Rating (DC)=75V, Width=0.031inch
R17 R18 R19 R20 R21 R22 R23 R25 R26 R28 R29 R30 R46 R47 R48 R49: library part CMP-2000-03816-5, "Chip Resistor, 0 Ohm, Jumper, 100 mW, -55 to 155 degC, 0603 (1608 Metric), RoHS, Tape and Reel", Manufacturer="Vishay Semiconductor", Max Operating Temperature="155 degC", Min Operating Temperature="-55 degC", Package Quantity=5000, Resistor=0R, Voltage Rating="75 V", ComponentLink1Description="Manufacturer URL", ComponentLink1URL=http://www.vishay.com/, ComponentLink2Description=Datasheet, ComponentLink2URL=http://www.vishay.com/docs/20035/dcrcwe3.pdf, DatasheetVersion=06/2012, Height="0.45 mm", Length="1.55 mm", Mount="Surface Mount", Mounting Technology="Surface Mount", PackageDescription="2-Pin Surface Mount Device, Body 1.575 x 0.85 mm", PackageReference=0603, Packaging="Tape and Reel", Pins=2, REACH SVHC=Unknown, RoHSCompliant=true
R31 R32 R33 R34 R35 R36 R37 R38 R39 R40 R41 R42 R43 R44 R45: library part CMP-2000-00179-1, Case Code (Imperial)=0603, Case Code (Metric)=1608, Manufacturer=Panasonic, Manufacturer Part Number=ERJ3EKF1000V, Max Operating Temperature=155°C, Max Power Dissipation=100mW, Min Operating Temperature=-55°C, Package Quantity=5000, Resistance=100R, Resistance Tolerance=1%, Resistor Type="Thick Film", Supplier Part Number 1=1755733, Temperature Coefficient=100ppm/°C, Voltage Rating=75V, Case/Package=0603, Category="Chip SMD Resistors", ComponentLink1Description=https://datasheet.ciiva.com/34303/1987450-34303565.pdf?src-supplier=Jameco, ComponentLink1URL=https://datasheet.ciiva.com/34303/1987450-34303565.pdf?src-supplier=Jameco, ComponentLink2Description=https://datasheet.ciiva.com/7830/aoa0000ce2-7830728.pdf?src-supplier=Element14, ComponentLink2URL=https://datasheet.ciiva.com/7830/aoa0000ce2-7830728.pdf?src-supplier=Element14, ComponentLink3Description=https://datasheet.ciiva.com/46372/1678782-46372726.pdf?src-supplier=Element14, ComponentLink3URL=https://datasheet.ciiva.com/46372/1678782-46372726.pdf?src-supplier=Element14, ComponentLink4Description=https://datasheet.ciiva.com/22667/1678782-22667887.pdf?src-supplier=Element14, ComponentLink4URL=https://datasheet.ciiva.com/22667/1678782-22667887.pdf?src-supplier=Element14, ComponentLink5Description=https://datasheet.ciiva.com/46372/1678782-46372727.pdf?src-supplier=Element14, ComponentLink5URL=https://datasheet.ciiva.com/46372/1678782-46372727.pdf?src-supplier=Element14, ComponentLink6Description=https://datasheet.ciiva.com/24159/aoa0000ce2-24159753.pdf?src-supplier=Mouser, ComponentLink6URL=https://datasheet.ciiva.com/24159/aoa0000ce2-24159753.pdf?src-supplier=Mouser, ComponentLink7Description=https://datasheet.ciiva.com/16762/70260748-16762666.pdf?src-supplier=Allied+Electronics, ComponentLink7URL=https://datasheet.ciiva.com/16762/70260748-16762666.pdf?src-supplier=Allied+Electronics, ComponentLink8Description=https://datasheet.ciiva.com/16765/70260748-16765766.pdf?src-supplier=Allied+Electronics, ComponentLink8URL=https://datasheet.ciiva.com/16765/70260748-16765766.pdf?src-supplier=Allied+Electronics, ComponentLink9Description=https://datasheet.ciiva.com/9186/aoa0000ce2-9186725.pdf?src-supplier=Avnet, ComponentLink9URL=https://datasheet.ciiva.com/9186/aoa0000ce2-9186725.pdf?src-supplier=Avnet, ComponentLink10Description=https://datasheet.ciiva.com/48530/aoa0000ce2-48530986.pdf?src-supplier=Avnet, ComponentLink10URL=https://datasheet.ciiva.com/48530/aoa0000ce2-48530986.pdf?src-supplier=Avnet, ComponentLink11Description=https://datasheet.ciiva.com/30088/aoa0000ce2-30088649.pdf?src-supplier=Onlinecomponents.com, ComponentLink11URL=https://datasheet.ciiva.com/30088/aoa0000ce2-30088649.pdf?src-supplier=Onlinecomponents.com, ComponentLink12Description=https://datasheet.ciiva.com/17207/aoa0000ce2-17207983.pdf?src-supplier=Avnet+Europe, ComponentLink12URL=https://datasheet.ciiva.com/17207/aoa0000ce2-17207983.pdf?src-supplier=Avnet+Europe, Construction=Rectangular, Contact Plating=Tin, Depth=0.8mm, Features="Automotive AEC-Q200", Height=0.45mm, Lead Free="Lead Free", Length=1.6mm, Military Standard=Not, Mount="Surface Mount", Number of Pins=2, Number of Terminations=2, Packaging="Tape and Reel", Part Number=ERJ-3EKF1000V, Power Rating=100mW, Pricing 1="5000=0,01000, 10000=0,00800, 15000=0,00800, 20000=0,00800, 5000=0,00700, 10000=0,00600, 15000=0,00600, 20000=0,00600 (USD)", Radiation Hardening=No, REACH SVHC="No SVHC", RoHS=Yes, RoHS Compliant=Yes, Series=ERJ, Size Code=0603, Stock 1=30000, Supplier 1=RSComponents, Termination=SMD/SMT, Tolerance=1%, Voltage Rating (DC)=75V, Weight=7.1E-05oz, Width=0.8mm
S1 S2 S3: "Switch", Manufacturer_Name="C & K COMPONENTS", Mouser Part Number=611-OS102011MS2QN1C, Datasheet Link=http://uk.rs-online.com/web/p/products/1546147, Height=8.7mm, Manufacturer_Part_Number=OS102011MS2QN1C, Mouser Price/Stock=https://www.mouser.co.uk/ProductDetail/CK/OS102011MS2QN1C?qs=FgXbtR4Gg7KP4hs8ueQ7Wg%3D%3D
SW1 SW2 SW3 SW4 SW5 SW6 SW7 SW8: library part CMP-2000-05160-2, Case/Package=SMD/SMT, Color=Black, Contact Resistance=100mR, Current Rating=50mA, Max Operating Temperature=60°C, Max Voltage Rating (DC)=12V, Min Operating Temperature=-20°C, Operating Force=160gf, Package Quantity=1, Actuator Length=0.85mm, Actuator Material=Nylon, Actuator Type=Standard, Contact Material=Silver, Contact Plating=Silver, Depth=9mm, Illumination Type=Non-Illuminated, Lead Free="Lead Free", Length=6mm, Max Current Rating=50mA, Mechanical Life=100000Cycles, Mount="Surface Mount", Orientation=Straight, Packaging="Tape and Reel", REACH SVHC="No SVHC", Switch Function=Off-Mom, Termination="Gull Wing", Throw Configuration=SPST, Voltage Rating (DC)=12V
U1: library part CMP-12105-000007-1, "IC MCU 32BIT 512KB FLASH 64LQFP", Ambient Temperature Range High=+85°C, Ambient Temperature Range Low=-40°C, Frequency=180MHz, Manufacturer=ST, Max Junction Temp=+105°C, Max Supply Voltage=3.6V, Min Supply Voltage=1.7V, Package=LQFP64-5W, Temperature="-40°C to +105°C", Automotive=No, Category=IC, ComponentLink2Description=Datasheet, ComponentLink2URL=https://www.st.com/en/microcontrollers-microprocessors/stm32f446re.html, Core Architecture="ARM Cortex-M4", Data Bus Width=32bits, Device Class L1="Integrated Circuits (ICs)", Device Class L2="Embedded Processors and Controllers", Device Class L3=Microcontrollers, Digikey Description="IC MCU 32BIT 512KB FLASH 64LQFP", Height=1.6mm, Interface=I2C,SPI,UART,USART,CAN,USB,LIN,IrDA,I2S,Other, Ipc Land Pattern Name=QFP50P1200X1200X160-64, Lead Free=Yes, Manufacturer Part Number=STM32F446RET6, Memory Size=512KBytes, Memory Type=FLASH, Mouser Description="ARM Microcontrollers - MCU High-performance and DSP with FP, ARM Cortex-M4 MCU with 512 Kbytes Flash, 180 MHz CPU, Art Accelerator, SDRAM", Number Of A/D Converters=3, Number Of Adc Channels=16, Number Of Cores=1, Number Of I2C Channels=4, Number Of I/Os=50, Number Of Pwm Channels=32, Number Of Spi Channels=4, Number Of Timers/Counters=14, Number Of Uart Channels=6, Number Of Usb Channels=2, Octopart=https://octopart.com/stm32f446ret6-stmicroelectronics-52642920, Ram Size=128KBytes, RoHS=TRUE, Standoff Height=0.05mm, Temperature Range High=+105°C, Temperature Range Low=-40°C

## Free pads (board coordinates)
  round 6 hole 2.9: 1(56.134,-20.955) 2(1.778,-52.324)

## Via types
v1: diameter 0.6, hole 0.3, Top Layer to Bottom Layer, 71 vias

## Nets (pads, with @x,y where several pads share a name; then routed paths per layer and width w, separated by ;. In a path a pad name is that pad's centre, name@x,y a point inside that pad or via, vN(x,y) a via of type N, cw(c..) or ccw(c..) an arc to the next point about the centre after c; other vN are vias at no path point)
GND: C1.2 C2.2 C3.2 C4.2 C5.2 C6.2 C7.2 C8.2 C9.1 C10.2 C11.2 C12.2 C13.2 C14.2 C15.2 C16.2 C?.2 J1.03 J1.05 P1.2 P2.1 pad.1 pad.2 R4.1 R5.1 R6.1 R10.1 R11.1 R12.1 R15.1 R16.1 R27.1 S1.MH1 S1.MH2 S2.MH1 S2.MH2 S3.MH1 S3.MH2 U1.12 U1.18 U1.31 U1.47 U1.63 | length 34.2
  Top Layer w0.254: v1(19.788,-39.107) 19.854,-39.041 20.028,-39.041 20.097,-38.972 U1.47 ; v1(23.368,-31.496) 23.425,-31.439 23.425,-29.995 U1.31 ; v1(29.718,-42.672) 29.718,-42.593 29.948,-42.363 U1.63 ; U1.18 29.971,-29.995 29.971,-30.733 v1(30.48,-31.242) ; U1.12 33.429,-33.972 33.747,-34.29 v1(33.782,-34.29)
  Top Layer w0.762: v1(19.05,-42.164) C10.2 ; C12.2 v1(21.59,-26.162) ; C9.1 23.978,-26.046 v1(23.978,-25.039) ; C15.2 v1(26.67,-25.654) ; C11.2 v1(29.464,-26.162) ; C?.2 v1(33.02,-43.18) ; v1(34.29,-42.164) C13.2 ; C14.2 v1(36.83,-33.782) ; R27.1 v1(38.862,-43.434) ; v1(46.99,-48.26) 47.548,-48.26 C1.2 47.926,-48.006 R4.1 ; R12.1 v1(53.848,-14.478) ; v1(54.61,-48.006) 54.63,-47.986 R10.1 ; R6.1 55.156,-31.526 55.162,-31.532 55.162,-32.872 C3.2 55.31,-34.228 v1(55.341,-34.259) ; R15.1 v1(57.15,-14.478) ; v1(58.362,-34.139) 58.358,-34.135 C8.2 58.376,-33.002 58.376,-31.532 58.382,-31.526 R16.1 ; v1(62.23,-48.006) R5.1 ; v1(71.374,-48.006) 71.436,-47.944 72.478,-47.944 72.496,-47.962 74.02,-47.962 74.026,-47.968 R11.1 ; v1(73.152,-14.732) C16.2
  Bottom Layer w0.254: C6.2 53.656,-14.764 53.848,-14.572 v1(53.848,-14.478) ; C7.2 57.02,-14.702 57.15,-14.572 v1(57.15,-14.478)
  other v1: -9.398,-49.276 18.034,-44.704 34.544,-44.196 34.798,-37.084 0.762,-35.306 68.072,-33.274 41.91,-32.766 17.018,-29.718 1.016,-23.622 29.21,-22.352
NetC1_1: C1.1 R1.2 U1.56 | length 28.2
  Top Layer w0.254: U1.56 26.448,-44.736 29.718,-48.006 45.72,-48.006 47.182,-46.544 C1.1 R1.2@49.438,-46.544
NetC2_1: C2.1 R2.2 U1.58 | length 42.6
  Top Layer w0.254: U1.58 27.448,-44.212 30.226,-46.99 45.212,-46.99 46.99,-45.212 60.706,-45.212 62.038,-46.544 C2.1 64.82,-46.544 R2.2
NetC3_1: C3.1 R3.2 R49.1 | length 23.5
  Top Layer w0.254: R3.2 53.91,-31.588 C3.1 53.879,-33.051 53.879,-34.321 v1(55.118,-35.56) ; v1(67.31,-27.178) R49.1
  Bottom Layer w0.254: v1(55.118,-35.56) 61.722,-35.56 65.278,-32.004 65.278,-29.21 v1(67.31,-27.178)
NetC4_1: C4.1 R7.2 U1.57 | length 35.7
  Top Layer w0.254: U1.57 26.948,-44.474 29.972,-47.498 45.466,-47.498 47.244,-45.72 53.594,-45.72 54.418,-46.544 C4.1 57.2,-46.544 R7.2
NetC5_1: C5.1 R8.2 U1.59 | length 51.1
  Top Layer w0.254: U1.59 27.948,-43.95 30.48,-46.482 44.958,-46.482 46.736,-44.704 69.342,-44.704 71.182,-46.544 C5.1 73.964,-46.544 R8.2
NetC6_1: C6.1 R9.2 R47.2 | length 26.5
  Top Layer w0.254: R9.2 v1(55.118,-14.478) ; v1(67.31,-22.606) R47.2
  Bottom Layer w0.254: C6.1 55.087,-15.971 55.087,-14.509 v1(55.118,-14.478) 56.187,-14.478 56.949,-13.716 66.802,-13.716 69.088,-16.002 69.088,-20.828 v1(67.31,-22.606)
NetC7_1: C7.1 R13.2 R46.2 | length 18.3
  Top Layer w0.254: R13.2 v1(58.42,-14.478) ; v1(67.31,-19.558) R46.2
  Bottom Layer w0.254: C7.1 v1(58.42,-14.478) 66.548,-14.478 68.326,-16.256 68.326,-18.542 v1(67.31,-19.558)
NetC8_1: C8.1 R14.2 R48.1 | length 20.8
  Top Layer w0.254: R14.2 56.958,-31.718 C8.1 56.927,-33.051 56.927,-34.312 57.404,-34.789 v1(57.404,-34.798) ; v1(67.31,-25.654) R48.1
  Bottom Layer w0.254: v1(57.404,-34.798) 57.426,-34.82 58.644,-34.82 58.666,-34.798 61.468,-34.798 64.516,-31.75 64.516,-28.448 v1(67.31,-25.654)
NetC9_2: C9.2 U1.30 | length 2.2
  Top Layer w0.254: U1.30 23.948,-27.776 C9.2
NetJ2_1: J2.1 S1.2 | length 4.7
  Top Layer w0.762: J2.1 -7.414,-29.972 S1.2
NetJ2_2: J2.2 S1.3 | length 4.3
  Top Layer w0.762: J2.2 -8.662,-28.448 -8.186,-27.972 S1.3
NetJ3_1: J3.1 S2.2 | length 4.1
  Top Layer w0.762: J3.1 -8.787,-41.505 -4.929,-41.505 S2.2
NetJ3_2: J3.2 S2.3 | length 4.4
  Top Layer w0.762: J3.2 -8.662,-38.608 -7.868,-39.402 S2.3
NetJ4_1: J4.1 S3.2 | length 5.2
  Top Layer w0.762: J4.1 -6.231,-18.677 -4.929,-18.677 S3.2
NetJ4_2: J4.2 S3.3 | length 4.8
  Top Layer w0.762: J4.2 -7.128,-16.574 S3.3
NetLED1_2: LED1.2 R31.2 | length 5.7
  Top Layer w0.254: LED1.2@1.472,-38.074 1.472,-38.374 3.136,-40.038 3.136,-42.952 R31.2
NetLED1_3: LED1.3 R32.2 | length 1.9
  Top Layer w0.254: R32.2 0.254,-41.229 LED1.3
NetLED1_4: LED1.4 R33.2 | length 1.9
  Top Layer w0.254: LED1.4 1.723,-43.028 R33.2
NetLED2_2: LED2.2 R34.2 | length 5.7
  Top Layer w0.254: LED2.2 1.726,-26.944 3.302,-28.52 R34.2
NetLED2_3: LED2.3 R35.2 | length 1.9
  Top Layer w0.254: R35.2 0.274,-29.779 LED2.3
NetLED2_4: LED2.4 R36.2 | length 1.9
  Top Layer w0.254: LED2.4 1.723,-31.578 R36.2
NetLED3_2: LED3.2 R37.2 | length 5.7
  Top Layer w0.254: LED3.2 1.726,-15.26 3.302,-16.836 R37.2
NetLED3_3: LED3.3 R38.2 | length 1.9
  Top Layer w0.254: R38.2 0.309,-19.93 LED3.3
NetLED3_4: LED3.4 R39.2 | length 1.9
  Top Layer w0.254: LED3.4 1.723,-19.894 R39.2
NetLED4_2: LED4.2 R40.2 | length 5.3
  Top Layer w0.254: R40.2 63.448,-42.398 64.242,-41.604 LED4.2
NetLED4_3: LED4.3 R41.2 | length 2.3
  Top Layer w0.254: R41.2 59.537,-39.445 60.278,-40.187 LED4.3
NetLED4_4: LED4.4 R42.2 | length 2.2
  Top Layer w0.254: R42.2 59.553,-40.969 60.186,-41.601 LED4.4
NetLED5_2: LED5.2 R43.2 | length 5.3
  Top Layer w0.254: R43.2 52.545,-42.379 53.32,-41.604 LED5.2
NetLED5_3: LED5.3 R44.2 | length 2.3
  Top Layer w0.254: R44.2 48.615,-39.445 49.356,-40.187 LED5.3
NetLED5_4: LED5.4 R45.2 | length 2.2
  Top Layer w0.254: R45.2 48.631,-40.949 49.283,-41.601 LED5.4
NetP1_3: P1.3 R25.1 | length 23.4
  Bottom Layer w0.254: P1.3 22.606,-56.72 22.606,-38.675 26.341,-34.94 R25.1
NetP1_4: P1.4 R22.1 | length 23.6
  Bottom Layer w0.254: P1.4 25.146,-56.72 25.146,-39.258 29.116,-35.288 29.116,-35.213 29.389,-34.94 R22.1
NetP1_5: P1.5 R20.1 R?.1@27.798,-58.928 | length 25.4
  Top Layer w0.254: P1.5 27.743,-56.777 27.743,-58.873 R?.1@27.798,-58.928
  Bottom Layer w0.254: P1.5 27.686,-56.72 27.686,-38.242 R20.1
NetP1_6: P1.6 R23.1 | length 27.4
  Top Layer w0.254: v1(23.876,-52.578) 24.638,-53.34 26.67,-53.34 30.052,-56.722 P1.6
  Bottom Layer w0.254: v1(23.876,-52.578) 23.876,-39.004 27.592,-35.288 27.592,-35.213 27.865,-34.94 R23.1
NetP1_7: P1.7 R21.2 R?.1@32.654,-58.928 | length 33.4
  Top Layer w0.254: v1(21.59,-51.054) 22.179,-51.643 27.767,-51.643 30.226,-54.102 32.768,-56.644 P1.7 32.711,-56.779 32.711,-58.871 R?.1@32.654,-58.928
  Bottom Layer w0.254: v1(21.59,-51.054) 21.59,-38.242 24.544,-35.288 24.544,-35.213 24.817,-34.94 R21.2
NetP2_2: P2.2 R49.2 | length 3.1
  Top Layer w0.254: R49.2 72.293,-27.178 72.801,-27.686 P2.2
NetP2_4: P2.4 R48.2 | length 3.1
  Top Layer w0.254: R48.2 72.293,-25.654 72.801,-25.146 P2.4
NetP2_5: P2.5 R47.1 | length 6.5
  Top Layer w0.254: R47.1 71.374,-22.606 72.644,-21.336 74.422,-21.336 P2.5
NetP2_6: P2.6 R18.1 | length 3.5
  Top Layer w0.254: R18.1 71.374,-24.13 72.898,-22.606 P2.6
NetP2_7: P2.7 R46.1 | length 6.3
  Top Layer w0.254: R46.1 71.374,-19.558 72.136,-18.796 74.422,-18.796 P2.7
NetP2_8: P2.8 R19.1 | length 3.3
  Top Layer w0.254: R19.1 71.374,-21.082 72.142,-20.314 72.904,-20.314 P2.8
NetP2_10: P2.10 R17.1 | length 3.1
  Top Layer w0.254: R17.1 72.293,-18.034 72.801,-17.526 P2.10
NetR1_1: R1.1 R4.2 SW1.3 SW1.4 | length 13.6
  Top Layer w0.254: SW1.4 47.534,-49.748 48.057,-49.225 48.182,-49.225 48.385,-49.022 49.864,-49.022 50.83,-48.056 R4.2 ; R4.2@50.8,-48.006 R1.1@50.8,-46.482
NetR2_1: R2.1 R5.2 SW2.3 SW2.4 | length 13.8
  Top Layer w0.254: SW2.4 62.774,-49.748 63.297,-49.225 63.422,-49.225 63.625,-49.022 65.216,-49.022 65.934,-48.304 66.182,-48.056 R2.1
NetR3_1: R3.1 R6.2 SW3.3 SW3.4 | length 11.2
  Top Layer w0.254: SW3.3 52.034,-30.734 ; SW3.4 52.034,-30.734 ; R6.2 R3.1 52.542,-30.226 52.034,-30.734
NetR7_1: R7.1 R10.2 SW4.3 SW4.4 | length 13.7
  Top Layer w0.254: SW4.4 55.154,-49.748 55.677,-49.225 55.802,-49.225 56.005,-49.022 57.526,-49.022 58.264,-48.284 58.314,-48.284 58.562,-48.036 R10.2 R7.1
NetR8_1: R8.1 R11.2 SW5.3 SW5.4 | length 13.8
  Top Layer w0.254: SW5.4 71.918,-49.748 72.441,-49.225 72.566,-49.225 72.769,-49.022 74.31,-49.022 75.028,-48.304 75.078,-48.304 75.326,-48.056 R11.2 R8.1
NetR9_1: R9.1 R12.2 SW6.3 SW6.4 | length 11.4
  Top Layer w0.254: SW6.3 52.034,-15.454 53.12,-16.54 R12.2 R9.1
NetR13_1: R13.1 R15.2 SW7.3 SW7.4 | length 16
  Top Layer w0.254: R15.2 R13.1 63.648,-16.54 SW7.4@64.734,-15.454 ; SW7.3 SW7.4@64.734,-15.454 ; SW7.4 SW7.4@64.734,-15.454
NetR14_1: R14.1 R16.2 SW8.3 SW8.4 | length 15.8
  Top Layer w0.254: R14.1 R16.2 63.972,-30.226 64.734,-30.988 ; SW8.3 64.734,-30.988 ; SW8.4 64.734,-30.988
NetR17_2: R17.2 U1.14 | length 42.7
  Top Layer w0.254: U1.14 33.482,-32.972 33.688,-32.766 v1(33.782,-32.766) ; v1(67.31,-18.034) R17.2
  Bottom Layer w0.254: v1(33.782,-32.766) 35.306,-32.766 42.418,-25.654 59.69,-25.654 v1(67.31,-18.034)
NetR18_2: R18.2 U1.16 | length 39.8
  Top Layer w0.254: U1.16 32.464,-31.988 38.846,-31.988 v1(38.862,-32.004) ; v1(67.31,-24.13) R18.2
  Bottom Layer w0.254: v1(38.862,-32.004) 43.688,-27.178 64.262,-27.178 v1(67.31,-24.13)
NetR19_2: R19.2 U1.17 | length 42.9
  Top Layer w0.254: U1.17 30.448,-28.734 32.766,-26.416 v1(43.18,-26.416) ; v1(67.31,-21.082) R19.2
  Bottom Layer w0.254: v1(43.18,-26.416) 61.976,-26.416 v1(67.31,-21.082)
NetR20_2: R20.2 U1.20 | length 4.8
  Top Layer w0.254: U1.20 28.971,-29.995 28.971,-30.707 30.455,-32.192 30.922,-32.192 v1(30.988,-32.258)
  Bottom Layer w0.254: R20.2 v1(30.988,-32.258)
NetR21_1: R21.1 U1.24 | length 4.8
  Top Layer w0.254: v1(24.892,-32.258) 24.958,-32.192 25.441,-32.192 26.925,-30.707 26.925,-29.995 U1.24
  Bottom Layer w0.254: R21.1 v1(24.892,-32.258)
NetR22_2: R22.2 U1.21 | length 4.1
  Top Layer w0.254: U1.21 28.448,-31.242 v1(29.464,-32.258)
  Bottom Layer w0.254: R22.2 v1(29.464,-32.258)
NetR23_2: R23.2 U1.22 | length 3.7
  Top Layer w0.254: v1(27.94,-32.258) 27.944,-32.254 27.944,-29.976 U1.22
  Bottom Layer w0.254: R23.2 v1(27.94,-32.258)
NetR24_1: R24.1 R27.2 U1.60 | length 13.5
  Top Layer w0.254: U1.60 28.448,-43.688 30.734,-45.974 35.672,-45.974 36.644,-45.002 36.694,-45.002 36.942,-44.754 R24.1 R27.2
NetR25_2: R25.2 U1.23 | length 4.1
  Top Layer w0.254: v1(26.416,-32.258) 27.448,-31.226 U1.23
  Bottom Layer w0.254: R25.2 v1(26.416,-32.258)
NetR26_1: R26.1 U1.7 | length 53
  Top Layer w0.254: R26.1 4.064,-56.134 10.414,-49.784 v1(28.448,-49.784) ; v1(30.769,-36.472) U1.7
  Bottom Layer w0.254: v1(28.448,-49.784) 29.037,-49.195 29.037,-38.203 v1(30.769,-36.472)
NetR28_2: R28.2 U1.46 | length 32.3
  Top Layer w0.151: R28.2 -5.782,-51.39 -5.416,-51.39 -0.508,-46.482 9.906,-46.482 17.916,-38.472 U1.46
NetR29_2: R29.2 U1.49 | length 35.7
  Top Layer w0.151: R29.2 -5.954,-53.011 -5.629,-52.686 -5.554,-52.686 -0.112,-47.244 20.574,-47.244 22.948,-44.87 U1.49
NetR30_2: R30.2 U1.55 | length 39.4
  Top Layer w0.151: R30.2 -5.954,-54.535 -5.629,-54.21 -5.554,-54.21 0.65,-48.006 22.86,-48.006 25.948,-44.918 U1.55
NetR31_1: R31.1 U1.43 | length 20.7
  Top Layer w0.254: R31.1 6.979,-44.329 14.336,-36.972 U1.43
NetR32_1: R32.1 U1.45 | length 24.5
  Top Layer w0.254: R32.1 0.329,-44.329 1.72,-45.72 8.382,-45.72 16.13,-37.972 U1.45
NetR33_1: R33.1 U1.44 | length 22.8
  Top Layer w0.254: R33.1 1.833,-44.313 2.732,-45.212 7.62,-45.212 15.36,-37.472 U1.44
NetR34_1: R34.1 U1.40 | length 18.7
  Top Layer w0.254: R34.1 3.377,-32.899 5.95,-35.472 U1.40
NetR35_1: R35.1 U1.42 | length 22.2
  Top Layer w0.254: R35.1 0.349,-32.899 3.921,-36.472 U1.42
NetR36_1: R36.1 U1.41 | length 20.4
  Top Layer w0.254: R36.1 1.853,-32.883 4.942,-35.972 U1.41
NetR37_1: R37.1 U1.37 | length 22.9
  Top Layer w0.254: R37.1 3.377,-21.215 16.134,-33.972 U1.37
NetR38_1: R38.1 U1.39 | length 26.4
  Top Layer w0.254: R38.1 0.349,-21.215 14.105,-34.972 U1.39
NetR39_1: R39.1 U1.38 | length 24.7
  Top Layer w0.254: R39.1 1.853,-21.199 15.126,-34.472 U1.38
NetR40_1: R40.1 U1.8 | length 28.5
  Top Layer w0.254: U1.8 35.972,-35.972 38.1,-38.1 53.988,-38.1 57.989,-42.1 58.064,-42.1 58.287,-42.323 R40.1
NetR41_1: R41.1 U1.10 | length 27.7
  Top Layer w0.254: U1.10 36.496,-34.972 38.608,-37.084 54.61,-37.084 56.896,-39.37 R41.1
NetR42_1: R42.1 U1.9 | length 28.1
  Top Layer w0.254: U1.9 36.234,-35.472 38.354,-37.592 54.356,-37.592 57.658,-40.894 R42.1
NetR43_1: R43.1 U1.2 | length 16.4
  Top Layer w0.254: U1.2 35.924,-38.972 37.338,-40.386 45.447,-40.386 47.365,-42.304 R43.1
NetR44_1: R44.1 U1.4 | length 15.5
  Top Layer w0.254: U1.4 36.448,-37.972 37.846,-39.37 R44.1
NetR45_1: R45.1 U1.3 | length 15.9
  Top Layer w0.254: U1.3 36.186,-38.472 37.592,-39.878 45.974,-39.878 46.799,-40.703 47.21,-40.703 R45.1
NRST_DEBUG: J1.10 R26.2 | length 2.2
  Top Layer w0.254: J1.10 -7.508,-56.388 R26.2
SWCLK: J1.04 R29.1 | length 2.4
  Top Layer w0.151: J1.04 -9.345,-52.578 -8.837,-53.086 R29.1
SWDIO: J1.02 R28.1 | length 2.2
  Top Layer w0.151: J1.02 -7.508,-51.308 R28.1
SWO: J1.06 R30.1 | length 2.5
  Top Layer w0.151: J1.06 -8.636,-54.61 R30.1
VCC: C10.1 C11.1 C12.1 C13.1 C14.1 C15.1 C16.1 C?.1 J1.01 LED1.1 LED2.1 LED3.1 LED4.1 LED5.1 P1.1 P2.9 R24.2 R?.2 SW1.1 SW1.2 SW2.1 SW2.2 SW3.1 SW3.2 SW4.1 SW4.2 SW5.1 SW5.2 SW6.1 SW6.2 SW7.1 SW7.2 SW8.1 SW8.2 U1.1 U1.13 U1.19 U1.32 U1.48 U1.64 | length 14.8
  Top Layer w0.254: C10.1 19.167,-40.077 19.781,-40.077 U1.48@20.404,-39.454 ; C12.1 22.925,-29.467 22.925,-29.949 U1.32 ; C15.1 26.699,-28.132 C11.1 29.456,-28.14 29.456,-29.964 U1.19 ; R?.2@29.098,-58.928 v1(29.718,-58.928) ; v1(30.734,-58.928) R?.2@31.354,-58.928 ; U1.1 33.884,-39.472 34.29,-39.878 C13.1 ; U1.13 33.98,-33.472 34.29,-33.782 C14.1
  other v1: 69.088,-53.594 35.56,-53.086 13.462,-52.832 -6.096,-49.276 14.986,-44.704 67.818,-42.418 8.636,-39.37 -0.762,-35.306 8.382,-33.02 56.134,-28.448 -0.762,-23.622 31.496,-22.352 70.358,-14.732
pads on no net: J1.07 J1.08 J1.09 J2. J3. J4. P1.8 P2.3 S1.1 S2.1 S3.1 U1.5 U1.6 U1.11 U1.15 U1.25 U1.26 U1.27 U1.28 U1.29 U1.33 U1.34 U1.35 U1.36 U1.50 U1.51 U1.52 U1.53 U1.54 U1.61 U1.62

## Polygon pours and split planes (outlines as drawn)
GND on Int1 (GND) "GND_L02_P001" (solid, remove dead copper, pour order 1): -22.606,-8.382 81.534,-8.382 82.804,-7.112 82.804,-64.516 -21.336,-64.516 -22.352,-63.5
GND on Int2 (GND) "GND_L03_P002" (solid, remove dead copper, pour order 2): -23.114,-7.366 -22.86,-7.112 83.312,-7.112 83.312,-64.77 83.82,-65.278 83.566,-65.532 -23.114,-65.532
VCC on Bottom Layer "VCC_L04_P003" (solid, remove dead copper, pour order 3): -25.146,-6.096 84.074,-6.096 84.836,-5.334 85.09,-5.588 85.09,-66.548 -23.876,-66.548 -24.13,-66.294
VCC on Top Layer "VCC_L01_P000" (solid, remove dead copper, pour order 0): -21.082,-10.16 -20.574,-9.652 82.042,-9.652 82.042,-62.992 82.296,-63.246 -21.336,-63.246

## Silkscreen, mask and mechanical layers (free items; w line width, h text height)
Top Overlay:
  lines w0.254: 74.422,-37.846 70.866,-37.846 70.866,-29.21 74.422,-29.21 ; 74.422,-37.846 74.422,-29.21 ; 74.422,-37.846 77.978,-37.846 77.978,-29.21 74.422,-29.21 ; 74.422,-37.846 74.422,-29.21 ; -18.288,-45.72 6.096,-45.72 6.096,-14.224 -18.288,-14.224 -18.288,-45.72 ; 6.604,-59.182 43.688,-59.182 43.688,-14.224 6.604,-14.224 6.604,-59.182 ; 44.196,-59.182 78.486,-59.182 78.486,-45.466 44.196,-45.466 44.196,-59.182 ; 44.196,-44.958 66.04,-44.958 66.04,-34.798 44.196,-34.798 44.196,-44.958 ; 44.196,-34.29 66.04,-34.29 66.04,-14.224 44.196,-14.224 44.196,-34.29 ; 69.596,-59.182 69.596,-45.466 69.596,-59.182
  text "M2" at 5.334,-19.05 h1.52 r90
  text "CLOSE" at 46.228,-23.114 h1.52 r90
  text "M1" at 5.334,-30.734 h1.52 r90
  text "RST" at 71.374,-30.734 h0.76
  text "3V3" at 74.93,-30.734 h0.76
  text "OPEN" at 46.228,-32.004 h1.52 r90
  text "RX" at 71.374,-32.258 h0.76
  text "DIO2" at 74.93,-32.258 h0.76
  text "TX" at 71.374,-33.782 h0.76
  text "DIO3" at 74.93,-33.782 h0.76
  text "DIO1" at 71.374,-35.306 h0.76
  text "NC" at 74.93,-35.306 h0.76
  text "DIO4" at 71.374,-36.83 h0.76
  text "GND" at 74.93,-36.83 h0.76
  text "STM32" at 27.178,-39.116 h1.52 r90
  text "SEQ" at 5.334,-42.164 h1.52 r90
  text "LEDS" at 46.228,-42.672 h1.52 r90
  text "U" at 40.132,-43.688 h0.76 r90
  text "D" at 40.132,-44.958 h0.76 r90
  text "v" at 52.07,-46.736 h1.52 r270
  text "v" at 68.326,-47.752 h1.52 r90
  text "x" at 76.454,-47.752 h1.52
  text "O" at 59.944,-48.006 h1.52
  text "SWD" at -4.826,-51.816 h0.76
  text "OLED" at 9.398,-53.34 h1.52 r90
  text "SWC" at -4.826,-53.594 h0.76
  text "SWO" at -4.826,-55.118 h0.76
  text "NRST" at -4.826,-56.642 h0.76
  text "OLED" at 46.228,-56.642 h1.52 r90
  text "DBG" at -13.97,-59.436 h1.52
Bottom Overlay:
  text "NRST" at 25.146,-28.194 h0.76 r90
  text "MOSI" at 26.67,-28.448 h0.76 r90
  text "CLK" at 29.718,-28.956 h0.76 r90
  text "DC" at 28.194,-29.718 h0.76 r90
  text "SS" at 31.242,-29.718 h0.76 r90
Mechanical 1:
  text "Top" at -23.368,-36.83 h1.52 r90
  text "Bottom" at 85.852,-37.846 h1.52 r90
Board Shape:
  the board outline again, w1.2